# Altium PCB CT310高端控制盒基板电路V1.0.PcbDoc (part 1 of 8)
Units mil, origin at the board's own origin, x right, y up, seen from the top; angles counter-clockwise.
Board outline 8162.61 x 6196.81 mil, 2 copper layers (Top Layer, Bottom Layer), stack 65.792 mil thick; 265 components, 178 nets, 926 pads, 298 vias.
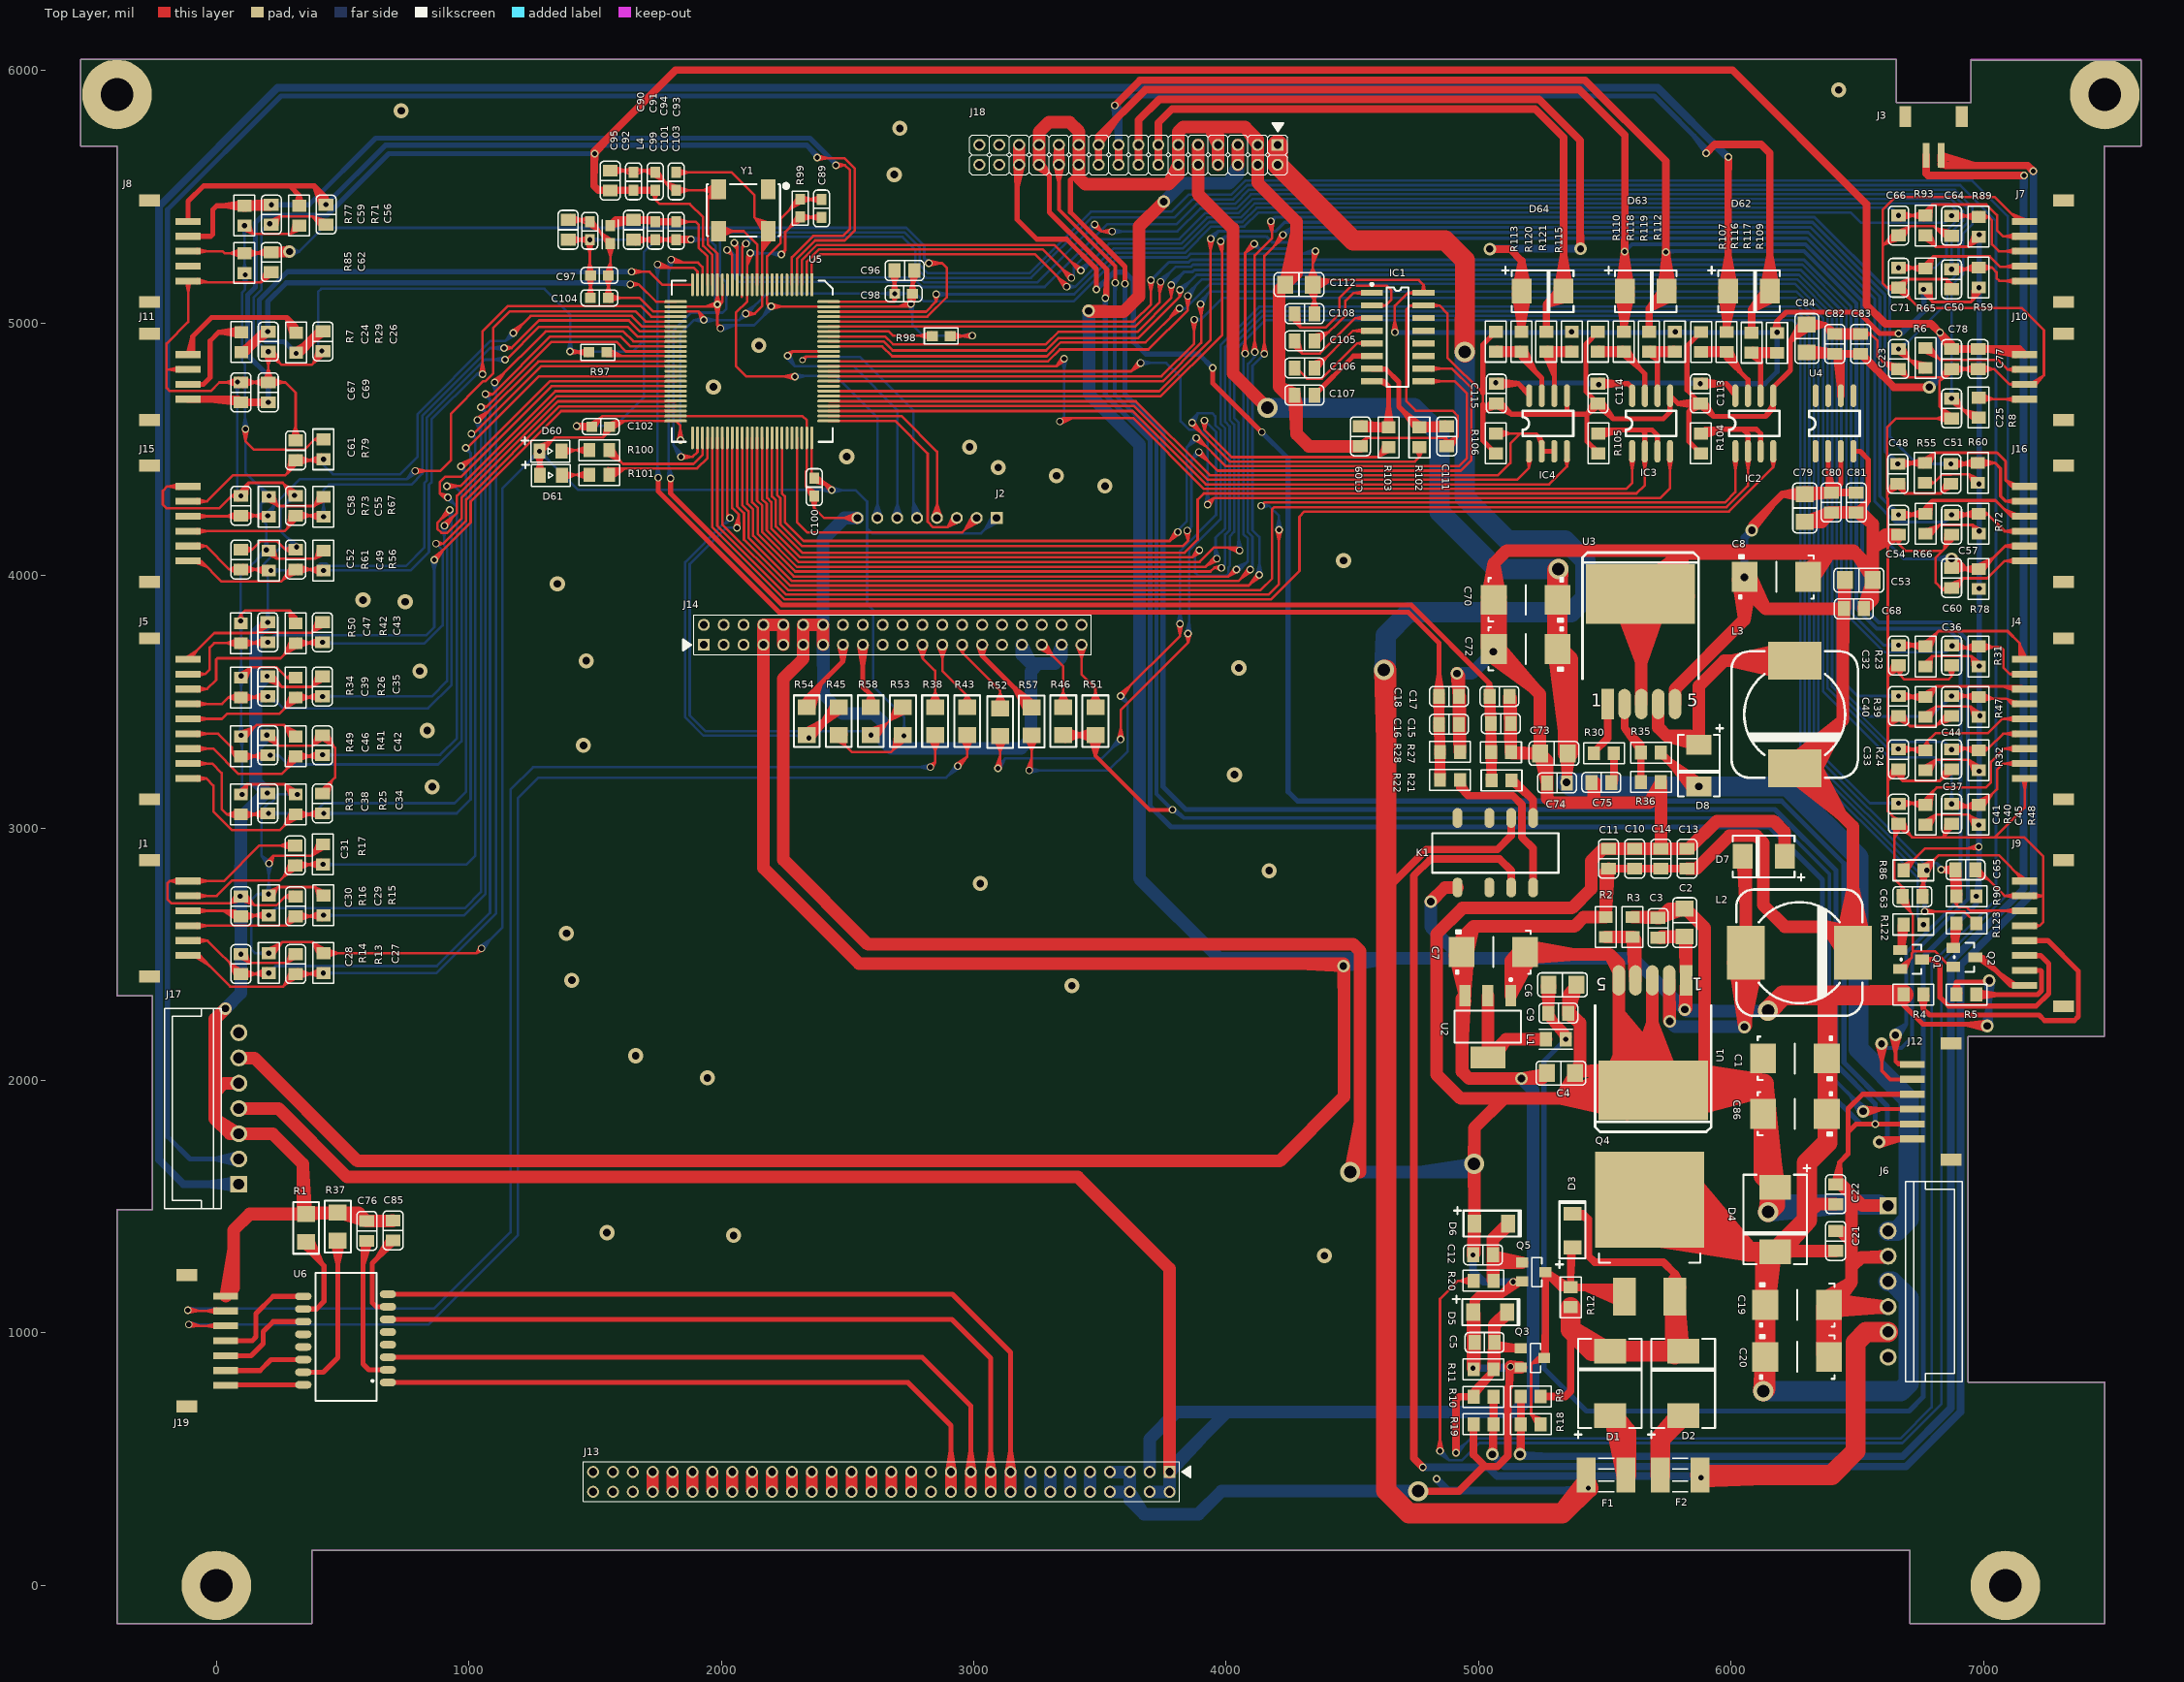
[diagram p0: Top Layer view]
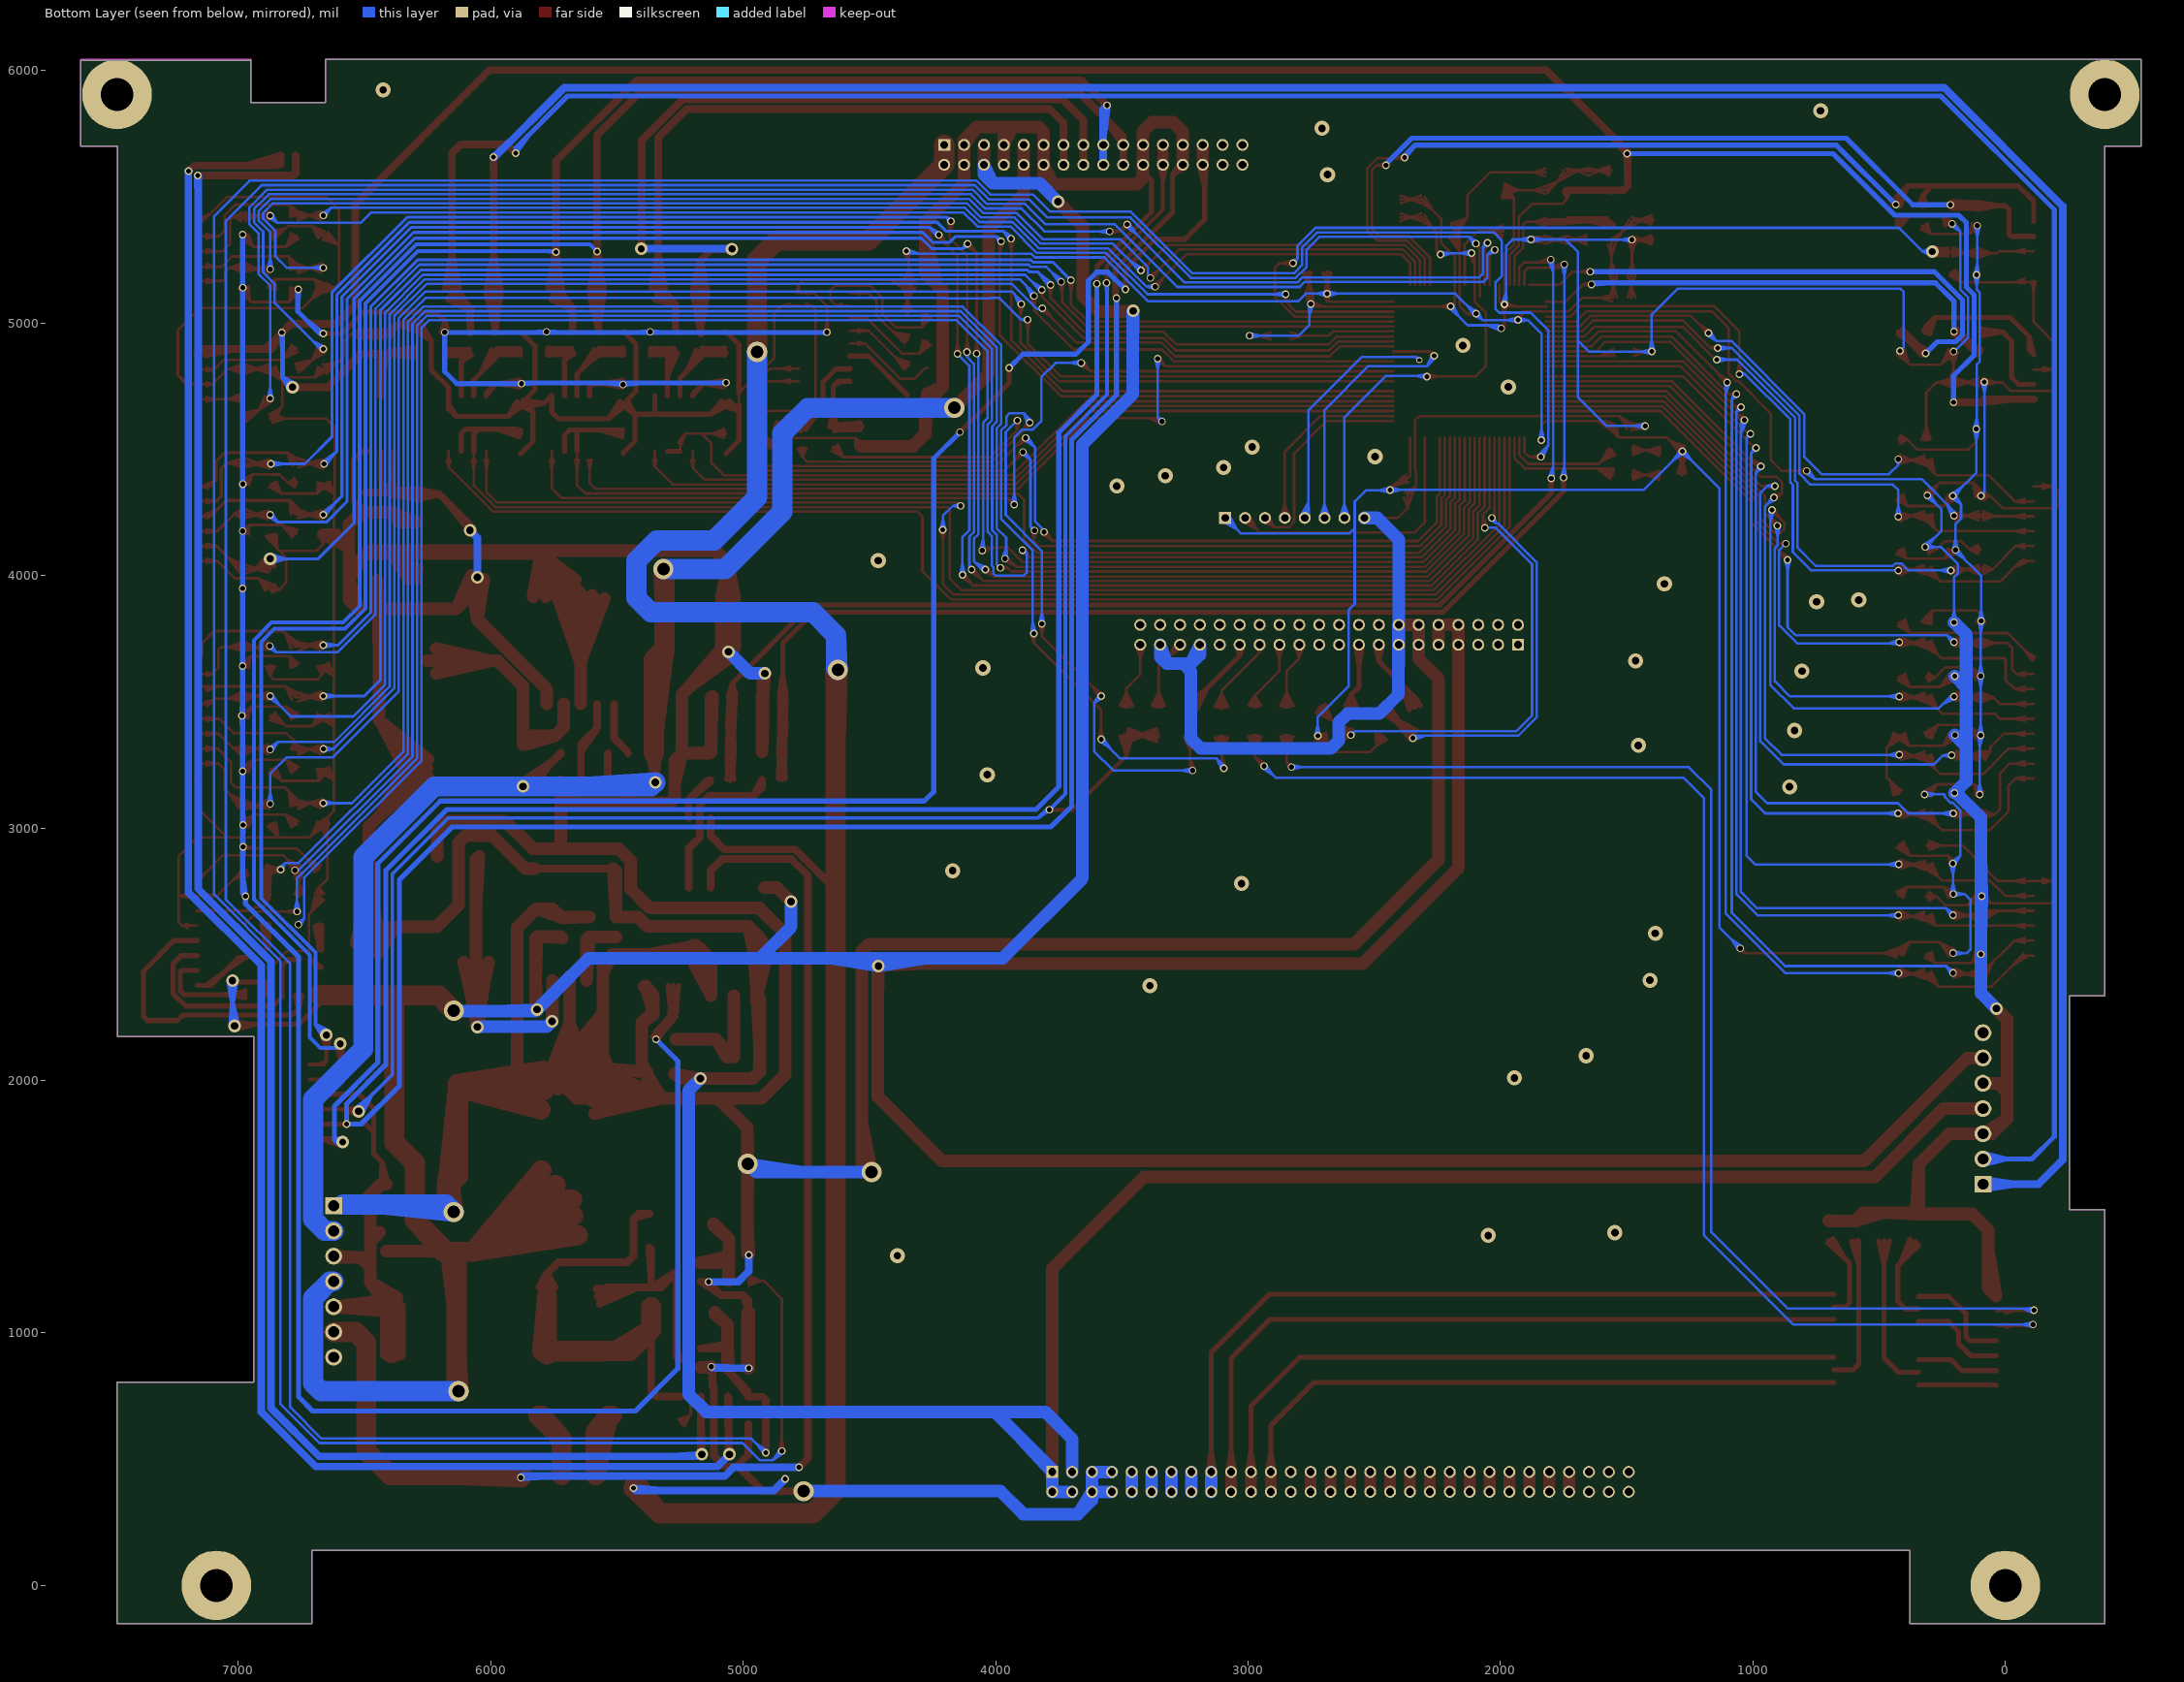
[diagram p1: Bottom Layer view, seen from below]
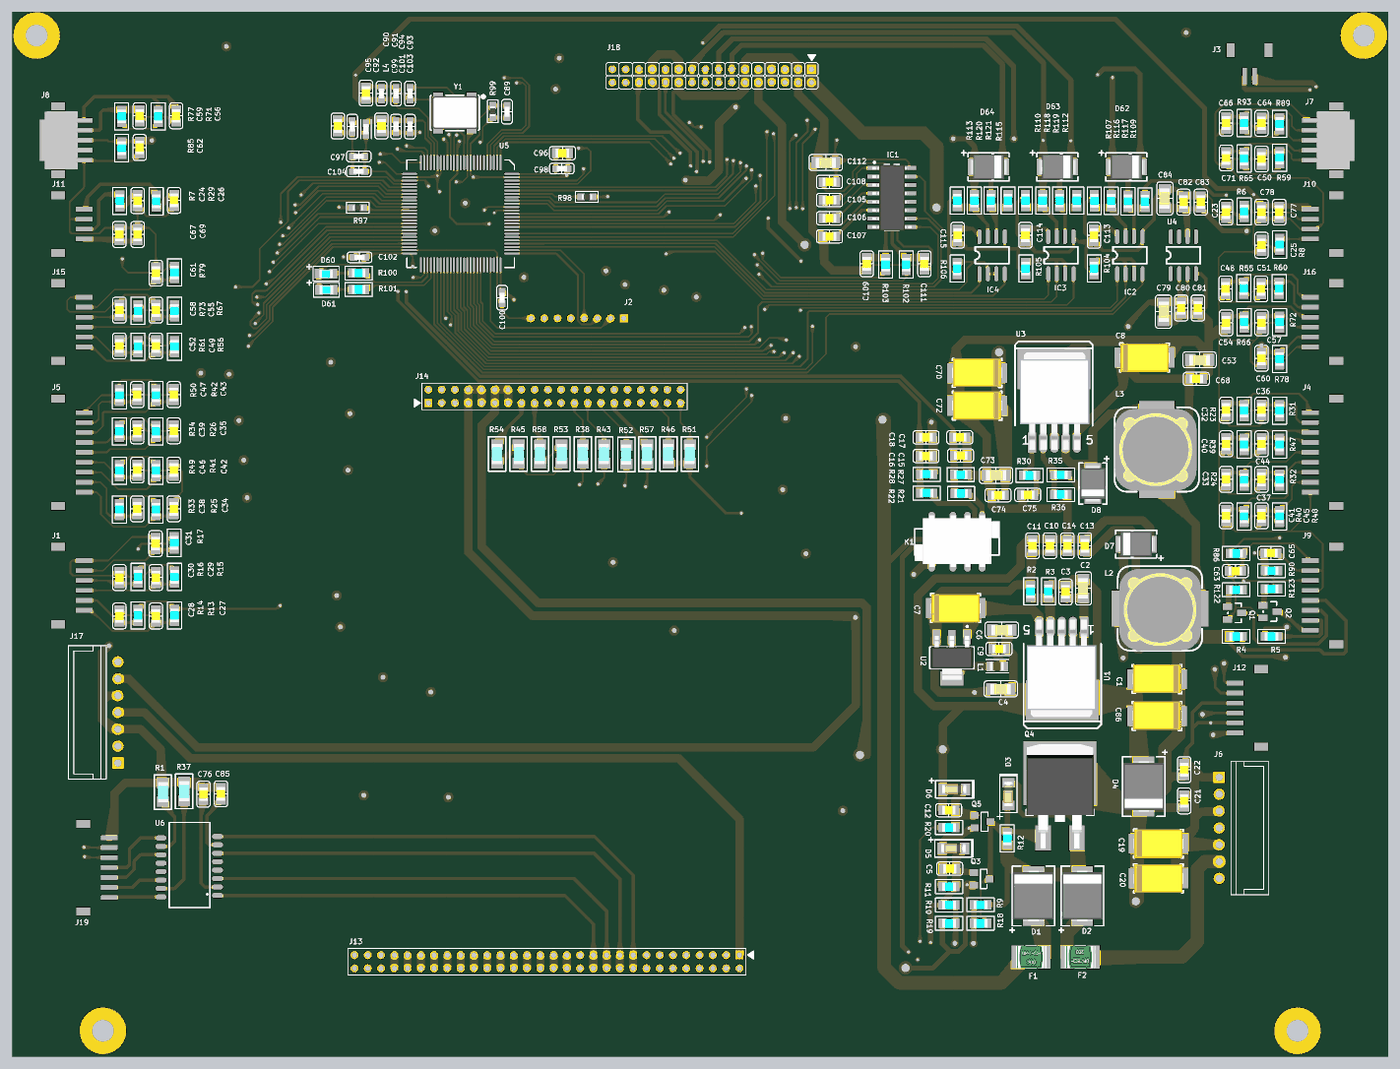
[diagram p9: 3D render of the assembled board from above, using the file's embedded part models]

## Layer stack, top to bottom
Top Layer: signal copper 1.4
Dielectric: core 62.9921, FR-4, Dk 4.8
Bottom Layer: signal copper 1.4

## Board outline
-538,5701 -393.7,5701 -393.7,2335 -253,2335 -253,1488 -392,1488 -393.7,1488 -393.7,-152 379,-152 379,139.3 6707.61,139.3 6707.61,137 6707.61,-152 7480.31,-152 7480.31,-147 7480.31,805 6939,805 6939,811 6939,2174 7479,2174 7479,5701 7624.61,5701 7624.61,6041 6951,6041 6951,6044.81 6951,5874 6655,5874 6655,6044.81 -538,6044.81 -538,5701

## Design rules (kind name [scope] priority, off if disabled: settings)
Clearance [All] p1: gap=8
PolygonConnect [All] p1: connectstyle=Relief reliefconductorwidth=10 reliefentries=4 polygonreliefangle="90 Angle" airgapwidth=10
RoutingVias [All] p1: holewidth=28 width=50 viastyle="Through Hole" minholewidth=16 minwidth=23 maxholewidth=50 maxwidth=100
SilkToSilkClearance [All] p1: silktosilkclearance=0
SilkToSolderMaskClearance SilkscreenOverComponentPads [IsPad] p1: minsilkscreentomaskgap=0 clearancetoexposedcopper=TRUE
SolderMaskExpansion [All] p1: expansion=4
Width [All] p1: maxlimit=100 minlimit=8 preferedwidth=10 minimp=50.000000 maximp=50.000000 favimp=50.000000
26 further rules are at their usual default settings.

## Classes and differential pairs
component class DataVideoPort: J18
component class TTL_TO_RS485: C113 C114 C115 D62 D63 D64 IC2 IC3 IC4 R104 R105 R106 R107 R109 R110 R112 R113 R115 R116 R117 R118 R119 R120 R121
component class TTL_TO_RS232: C105 C106 C107 C108 C109 C111 C112 IC1 R102 R103
component class RightInterface: J6 J12
component class Processor: C89 C90 C91 C92 C93 C94 C95 C96 C97 C98 C99 C100 C101 C102 C103 C104 D60 D61 J2 L4 R97 R98 R99 R100 R101 U5 Y1
component class PowerConvert: C1 C2 C3 C4 C6 C7 C8 C9 C10 C11 C13 C14 C53 C68 C70 C72 C73 C74 C79 C80 C81 C82 C83 C84 C86 D7 D8 L1 L2 L3 R2 R3 R30 R35 R36 U1 U2 U3 U4
component class OmapSystem: J13 J14 P14 R38 R43 R45 R46 R51 R52 R53 R54 R57 R58
component class LeftInterface: C76 C85 J17 J19 R1 R37 U6
component class KeyInput_MG: C50 C56 C59 C62 C63 C64 C65 C66 C71 J7 J8 J9 P6 Q1 Q2 R4 R5 R59 R65 R71 R77 R85 R86 R89 R90 R93 R122 R123
component class KeyInput_IJMEF: C48 C49 C51 C52 C54 C55 C57 C58 C60 C61 J15 J16 R55 R56 R60 R61 R66 R67 R72 R73 R78 R79
component class KeyInput_ABH: C27 C28 C29 C30 C31 C32 C33 C34 C35 C36 C37 C38 C39 C40 C41 C42 C43 C44 C45 C46 C47 J1 J4 J5 R13 R14 R15 R16 R17 R23 R24 R25 R26 R31 R32 R33 R34 R39 R40 R41 R42 R47 R48 R49 R50
component class JoyStickAdcInput: C23 C24 C25 C26 C67 C69 C77 C78 J10 J11 R6 R7 R8 R29
component class PowerManager: C5 C12 C15 C16 C17 C18 C19 C20 C21 C22 D1 D2 D3 D4 D5 D6 F1 F2 J3 K1 Q3 Q4 Q5 R9 R10 R11 R12 R18 R19 R20 R21 R22 R27 R28

## Components (designator, comment, footprint, x,y, rotation, side; value= is the part's Value field where it differs from the comment)
C1 "100uF/25V" CT7343-E-S 6253,2087 r180 top
C2 "2.2uF" C1206 5816.3,2625.3 r270 top
C3 "0.1uF" C0805 5710.3,2604.3 r270 top
C4 "22uF" C1206 5326,2029 r0 top
C5 "0.1uF" C0805 5023.3,962.3 r0 top
C6 "22uF" C1206 5332,2379 r0 top
C7 "100uF/25V" CT7343-E-S 5058,2509 r0 top
C8 "100uF/25V" CT7343-E-S 6179,3995 r0 top
C9 "0.1uF" C0805 5315.64,2266.3 r180 top
C10 "0.1uF" C0805 5617.96,2878.3 r270 top
C11 "0.1uF" C0805 5514.3,2878.3 r270 top
C12 "100pF" C0805 5017.3,1309.3 r0 top
C13 "100pF" C0805 5825.3,2878.3 r270 top
C14 "10uF" C0805 5721.63,2878.3 r270 top
C15 "10uF" C0805 5087.7,3413.3 r0 top
C16 "10uF" C0805 4882.7,3410.31 r0 top
C17 "0.1uF" C0805 5082.7,3521.3 r0 top
C18 "0.1uF" C0805 4882.7,3521.3 r0 top
C19 "100uF/25V" CT7343-E-S 6261.3,1111.3 r0 top
C20 "100uF/25V" CT7343-E-S 6261.3,905 r0 top
C21 "0.1uF" C0805 6414.3,1364.3 r270 top
C22 "10uF" C0805 6414.3,1549.3 r270 top
C23 "100pF" C0805 6663.3,4857.36 r270 top
C24 "100pF" C0805 205.65,4926.3 r270 top
C25 "100pF" C0805 6873.32,4661.36 r270 top
C26 "100pF" C0805 422.3,4927.3 r270 top
C27 "100pF" C0805 313.97,2461.05 r90 top
C28 "100pF" C0805 97.33,2461.05 r90 top
C29 "100pF" C0805 313.97,2689.55 r90 top
C30 "100pF" C0805 97.33,2689.55 r90 top
C31 "100pF" C0805 311.97,2891.3 r90 top
C32 "100pF" C0805 6663.3,3683.23 r270 top
C33 "100pF" C0805 6663.3,3272.23 r270 top
C34 "100pF" C0805 420.3,3097.23 r90 top
C35 "100pF" C0805 420.3,3560.3 r90 top
C36 "100pF" C0805 6873.32,3683.23 r270 top
C37 "100pF" C0805 6873.32,3272.23 r270 top
C38 "100pF" C0805 203.65,3097.23 r90 top
C39 "100pF" C0805 203.65,3560.3 r90 top
C40 "100pF" C0805 6663.3,3483.23 r270 top
C41 "100pF" C0805 6663.3,3056.23 r270 top
C42 "100pF" C0805 420.3,3327.23 r90 top
C43 "100pF" C0805 420.3,3775.3 r90 top
C44 "100pF" C0805 6873.32,3483.23 r270 top
C45 "100pF" C0805 6873.32,3056.23 r270 top
C46 "100pF" C0805 203.65,3327.23 r90 top
C47 "100pF" C0805 203.65,3775.3 r90 top
C48 "100pF" C0805 6660.3,4402.73 r270 top
C49 "100pF" C0805 313.97,4063.23 r90 top
C50 "100pF" C0805 6873.32,5173.3 r270 top
C51 "100pF" C0805 6870.32,4402.73 r270 top
C52 "100pF" C0805 97.33,4063.23 r90 top
C53 "22uF" C1206 6505.9,3981.42 r0 top
C54 "100pF" C0805 6663.3,4200.86 r270 top
C55 "100pF" C0805 313.97,4276.23 r90 top
C56 "100pF" C0805 434.3,5429.3 r270 top
C57 "100pF" C0805 6873.32,4200.86 r270 top
C58 "100pF" C0805 97.33,4276.23 r90 top
C59 "100pF" C0805 217.65,5429.3 r270 top
C60 "100pF" C0805 6873.32,3990.23 r270 top
C61 "100pF" C0805 313.97,4495.73 r90 top
C62 "100pF" C0805 217.65,5241.3 r270 top
C63 "100pF" C0805 6718.36,2728.3 r180 top
C64 "100pF" C0805 6873.32,5385.3 r270 top
C65 "100pF" C0805 6928.36,2834.3 r0 top
C66 "100pF" C0805 6663.3,5386.3 r270 top
C67 "100pF" C0805 97.33,4725.3 r90 top
C68 "0.1uF" C0805 6486.3,3868.3 r180 top
C69 "1uF" C0805 205.65,4725.3 r90 top
C70 "100uF/25V" CT7343-E-S 5186,3903.3 r180 top
C71 "100pF" C0805 6663.3,5179.3 r270 top
C72 "100uF/25V" CT7343-E-S 5186,3709 r180 top
C73 "22uF" C1206 5298.3,3295.3 r180 top
C74 "0.1uF" C0805 5310.3,3178.3 r0 top
C75 "0.1uF" C0805 5486,3180.33 r0 top
C76 "0.01uF" C0805 596,1404 r90 top
C77 "100pF" C0805 6978.33,4857.36 r270 top
C78 "1uF" C0805 6873.32,4857.36 r270 top
C79 "22uF" C1206 6291.7,4267.3 r90 top
C80 "0.1uF" C0805 6396.7,4288.95 r90 top
C81 "100pF" C0805 6495.7,4288.95 r90 top
C82 "100pF" C0805 6410.7,4917.08 r270 top
C83 "0.1uF" C0805 6512.7,4917.08 r270 top
C84 "22uF" C1206 6300,4938.73 r270 top
C85 "0.01uF" C0805 700,1406 r90 top
C86 "100uF/25V" CT7343-E-S 6253,1868 r180 top
C89 "0.1uF" C0603 2397,5454 r90 top
C90 "10uF" C0805 1560,5564 r90 top
C91 "0.1uF" C0603 1652.36,5561.29 r90 top
C92 "0.1uF" C0603 1479.29,5365.36 r90 top
C93 "0.1uF" C0603 1821.3,5561.3 r90 top
C94 "100pF" C0603 1738.3,5561.29 r90 top
C95 "10uF" C0805 1393.29,5369.29 r90 top
C96 "10uF" C0805 2726,5208 r0 top
C97 "0.1uF" C0603 1517.3,5188.3 r180 top
C98 "0.1uF" C0603 2722.2,5116.3 r0 top
C99 "10uF" C0805 1652.36,5369.29 r90 top
C100 "0.1uF" C0603 2368,4350 r270 top
C101 "0.1uF" C0603 1738.29,5365.36 r90 top
C102 "0.1uF" C0603 1522.2,4589.3 r180 top
C103 "100pF" C0603 1821.29,5365.36 r90 top
C104 "0.1uF" C0603 1517.2,5099.3 r180 top
C105 "0.1uF" C0805 4309.95,4929.36 r0 top
C106 "0.1uF" C0805 4309.95,4821.83 r0 top
C107 "15pF" C0805 4309.95,4714.3 r180 top
C108 "0.1uF" C0805 4309.95,5036.89 r180 top
C109 "15pF" C0805 4531.3,4551.23 r270 top
C111 "15pF" C0805 4873.3,4551.23 r270 top
C112 "10uF" C1206 4288.3,5152.3 r0 top
C113 "0.1uF" C0805 5878.41,4720.58 r90 top
C114 "0.1uF" C0805 5472.23,4720.58 r90 top
C115 "0.1uF" C0805 5069.98,4720.58 r90 top
D1 "MBRS410LT3" SMC 5520.3,800.3 r90 top
D2 "MBRS410LT3" SMC 5810.3,800.3 r90 top
D3 "ZMM16" SOD-80 5371.3,1405.3 r90 top
D4 "1.5SMC15A" SMC 6174.3,1449.3 r270 top
D5 "ZMM1" SOD-80 5045.3,1082.3 r0 top
D6 "ZMM1" SOD-80 5050.3,1433.3 r0 top
D7 "SK58" SMB 6129.3,2887.3 r180 top
D8 "SK58" SMB 5872.3,3247.3 r270 top
D60 "LED-G" LED0805 1323.3,4492.3 r0 top
D61 "LED-G" LED0805 1325.26,4396.69 r0 top
D62 "1.5SMC6.8CA" SMB 6070.68,5126.02 r0 top
D63 "1.5SMC6.8CA" SMB 5662.18,5126.02 r0 top
D64 "1.5SMC6.8CA" SMB 5253.68,5126.02 r0 top
F1 "2A" F1812 5505.3,437.3 r0 top
F2 "2A" F1812 5798.3,437.3 r180 top
IC1 "SP3232EEN" SO16-150 4679.3,4944.3 r270 top
IC2 "SP3078EEN-L/TR" SO-8 6017.02,4492.02 r90 top
IC3 "SP3078EEN-L/TR" SO-8 5608.52,4492.02 r90 top
IC4 "SP3078EEN-L/TR" SO-8 5200.02,4492.02 r90 top
J1 "ZH1X6WT-1.5" ZH1X6WT-1.5 -188.7,2642.35 r90 top
J2 "HD1X8-2.00" SHD1X8-2.00 2815,4228 r180 top
J3 "DS1X2-2.54" ZH1X2WT-1.5 6802,5741 r0 top
J4 "ZH1X9WT-1.5" ZH1X9WT-1.5 7239.3,3432.3 r270 top
J5 "ZH1X9WT-1.5" ZH1X9WT-1.5 -188.7,3432.3 r90 top
J6 "DS1X7-2.54" DS1X7H-2.54 6622,1204 r90 top
J7 "ZH1X5WT-1.5" ZH1X5WT-1.5 7239.3,5284.3 r270 top
J8 "HEADER1X5" ZH1X5WT-1.5 -188.7,5284.3 r90 top
J9 "Header 8" ZH1X8WT-1.5 7239.3,2583.3 r270 top
J10 "ZH1X4WT-1.5" ZH1X4WT-1.5 7239.3,4786.69 r270 top
J11 "ZH1X4WT-1.5" ZH1X4WT-1.5 -188.7,4786.69 r90 top
J12 "DS1X6-2.54" ZH1X6WT-1.5 6794,1916 r270 top
J13 "HEADER 30X2" HD2X30-2.00 2633.93,410.06 r180 top
J14 "HEADER 2X20" HD2X20-2.00 2678.88,3765.06 r0 top
J15 "HEADER1X6" ZH1X6WT-1.5 -188.7,4205.3 r90 top
J16 "HEADER1X6" ZH1X6WT-1.5 7239.3,4205.3 r270 top
J17 "DS1X7-2.54" DS1X7H-2.54 89,1889 r270 top
J18 "HEADER2X16" HD2X16-2.00 3612.81,5666.3 r180 top
J19 "ZH1X7WT-1.5" ZH1X7WT-1.5 -40,969 r90 top
K1 "G6K-2F-Y" G6K-2F-Y 5066,2902 r0 top
L1 "10uH" L0805-C 5305.8,2163.3 r180 top
L2 "22uH" L5050-P 6270.3,2506.3 r180 top
L3 "100uH" L5050-P 6252.07,3449.3 r90 top
L4 "10uH" L0603-C 1560.3,5350.61 r90 top
Q1 "8050" SOT-23#1 6713.45,2479.3 r270 top
Q2 "8050" SOT-23#1 6923.45,2487.3 r270 top
Q3 "S8050" SOT-23#2 5213.3,901.3 r90 top
Q4 "IRF5210S" TO-262 5677.3,1528.3 r0 top
Q5 "S8050" SOT-23#2 5218.3,1241.3 r90 top
R1 "75R" R1206 355.17,1415.9 r90 top
R2 "10K" R0805 5503.3,2607.58 r270 top
R3 "3.3K" R0805 5609.6,2607.58 r270 top
R4 "1K" R0805 6722.3,2340.3 r0 top
R5 "1K" R0805 6932.29,2340.3 r0 top
R6 "10R" R0805 6770.28,4861.29 r90 top
R7 "10R" R0805 99.29,4924.3 r90 top
R8 "10R" R0805 6980.3,4665.3 r90 top
R9 "0R" R0805 5206.3,748.3 r0 top
R10 "10K" R0805 5019.3,746.95 r180 top
R11 "2K" R0805 5019.3,855.61 r0 top
R12 "10K" R0805 5364.41,1141.36 r90 top
R13 "4.7K" R0805 424.26,2464.98 r90 top
R14 "4.7K" R0805 207.62,2464.98 r90 top
R15 "4.7K" R0805 424.26,2693.48 r90 top
R16 "4.7K" R0805 207.62,2693.48 r90 top
R17 "4.7K" R0805 422.26,2895.23 r90 top
R18 "0R(N.C)" R0805 5206.3,638.3 r0 top
R19 "0R(N.C)" R0805 5019.3,638.3 r0 top
R20 "1K" R0805 5019.3,1206.3 r0 top
R21 "20K" R0805 5090.7,3188.3 r180 top
R22 "20K" R0805 4886.64,3190.3 r180 top
R23 "4.7K" R0805 6770.28,3679.3 r270 top
R24 "4.7K" R0805 6770.28,3268.3 r270 top
R25 "4.7K" R0805 313.94,3093.3 r90 top
R26 "4.7K" R0805 313.94,3556.36 r90 top
R27 "1K" R0805 5088.7,3300.3 r180 top
R28 "1K" R0805 4886.64,3301.28 r180 top
R29 "10R" R0805 315.94,4922.3 r90 top
R30 "2K" R0805 5496.17,3295.9 r0 top
R31 "4.7K" R0805 6980.3,3679.3 r270 top
R32 "4.7K" R0805 6980.3,3268.3 r270 top
R33 "4.7K" R0805 97.29,3093.3 r90 top
R34 "4.7K" R0805 97.29,3556.36 r90 top
R35 "10K" R0805 5682.3,3298.3 r180 top
R36 "2K" R0805 5682.3,3182.3 r0 top
R37 "75R" R1206 481,1421 r90 top
R38 "330R" R1206 2846.61,3423 r270 top
R39 "4.7K" R0805 6770.28,3479.3 r270 top
R40 "4.7K" R0805 6770.28,3052.3 r270 top
R41 "4.7K" R0805 313.94,3323.3 r90 top
R42 "4.7K" R0805 313.94,3771.36 r90 top
R43 "330R" R1206 2973.69,3423 r270 top
R45 "330R" R1206 2465.37,3423 r90 top
R46 "0R" R1206 3354.92,3423 r270 top
R47 "4.7K" R0805 6980.3,3479.29 r270 top
R48 "4.7K" R0805 6980.3,3052.29 r270 top
R49 "4.7K" R0805 97.29,3323.3 r90 top
R50 "4.7K" R0805 97.29,3771.36 r90 top
R51 "0R(NC)" R1206 3482,3423 r270 top
R52 "330R" R1206 3105,3419 r270 top
R53 "330R" R1206 2719.53,3423 r90 top
R54 "330R" R1206 2338.3,3423 r270 top
R55 "4.7K" R0805 6767.28,4406.67 r270 top
R56 "4.7K" R0805 424.26,4059.3 r90 top
R57 "330R" R1206 3229,3422 r270 top
R58 "330R" R1206 2592.45,3423 r270 top
R59 "4.7K" R0805 6980.3,5180.3 r270 top
R60 "4.7K" R0805 6977.3,4406.67 r270 top
R61 "4.7K" R0805 207.62,4059.3 r90 top
R65 "4.7K" R0805 6770.28,5176.3 r270 top
R66 "4.7K" R0805 6770.27,4204.8 r270 top
R67 "4.7K" R0805 424.26,4272.29 r90 top
R71 "4.7K" R0805 327.94,5425.36 r270 top
R72 "4.7K" R0805 6980.3,4204.8 r270 top
R73 "4.7K" R0805 207.62,4272.29 r90 top
R77 "4.7K" R0805 111.29,5425.36 r270 top
R78 "4.7K" R0805 6980.3,3986.3 r270 top
R79 "4.7K" R0805 424.26,4499.67 r90 top
R85 "4.7K" R0805 111.29,5237.36 r270 top
R86 "4.7K" R0805 6722.3,2832.3 r180 top
R89 "4.7K" R0805 6980.3,5381.3 r270 top
R90 "4.7K" R0805 6932.29,2729.77 r0 top
R93 "4.7K" R0805 6770.27,5386.3 r270 top
R97 "10K" R0603 1511.3,4884.3 r180 top
R98 "10K" R0603 2871,4948.3 r180 top
R99 "10K" R0603 2312.3,5455.3 r270 top
R100 "470R" R0805 1517.2,4496.3 r180 top
R101 "470R" R0805 1517.2,4398.69 r180 top
R102 "10R" R0805 4765.3,4547.3 r270 top
R103 "10R" R0805 4643.3,4547.3 r270 top
R104 "10K" R0805 5880.38,4523.02 r270 top
R105 "10K" R0805 5474.2,4523.02 r270 top
R106 "10K" R0805 5068.01,4523.02 r270 top
R107 "10K" R0805 5881.02,4925.02 r90 top
R109 "10K" R0805 6182.02,4921.02 r270 top
R110 "10K" R0805 5472.02,4926.01 r90 top
R112 "10K" R0805 5777.02,4926.02 r270 top
R113 "10K" R0805 5068.02,4926.01 r90 top
R115 "10K" R0805 5369.02,4926.01 r270 top
R116 "10R" R0805 5982.02,4925.02 r270 top
R117 "10R" R0805 6081.02,4922.02 r270 top
R118 "10R" R0805 5575.02,4926.02 r270 top
R119 "10R" R0805 5675.02,4926.02 r270 top
R120 "10R" R0805 5169.56,4926.02 r270 top
R121 "10R" R0805 5268.02,4926.02 r270 top
R122 "1K" R0805 6722.3,2617.3 r0 top
R123 "1K" R0805 6932.3,2622.3 r0 top
U1 "LM2596_ADJ" TO263 5821.3,2396.3 r180 top
U2 "AMS1117-3.3" SOT-223 5036.3,2213.3 r180 top
U3 "LM2577_ADJ" TO263 5511.17,3490.9 r0 top
U4 "REF192" SO-8 6334.7,4492.02 r90 top
U5 "STM32F103VCT6" STM32F103VCT6 2122.29,4848.3 r270 top
U6 "H1102NL" SOP16 512,974 r180 top
Y1 "XTAL 8MHz" "XTAL 5.0X7.0-SM" 2087.3,5446.3 r180 top

## Footprints (in the part's own frame and the unit in brackets; to place one, negate y for a bottom-side part, rotate by r counter-clockwise, add the part's x,y. Pads: shape width x height; smd on the part's side, far side on the other; paste and mask are expansions set on the pad)
C0603 [mm]
  rect 1.1x1 smd: 1(-0.9,0) 2(0.9,0)
  silkscreen extent -1.85,-0.8 1.85,0.8, body extent -0.76,-0.39 0.76,0.38, height 0.46
C0805 [mm]
  rect 1.2x1.5 smd: 1(-1,0) 2(1,0)
  silkscreen extent -1.95,-1 1.95,1, body extent -1.02,-0.64 1.02,0.64, height 0.61
C1206 [mm]
  rect 1.6x1.8 smd: 1(-1.4,0) 2(1.4,0)
  silkscreen extent -2.5,-1.2 2.5,1.2, body extent -1.52,-0.82 1.52,0.71, height 0.61
CT7343-E-S [mm]
  rect 2.6x3 smd: 1(-3.2,0) 2(3.2,0)
  silkscreen extent -3.75,-2.2 3.75,2.2, body extent -3.75,-2.2 3.75,2.12, height 4
DS1X7H-2.54 [mm]
  rect 1.7x1.7 hole 1.1: 1(7.62,0)
  round 1.7 hole 1.1: 2(5.08,0) 3(2.54,0) 4(0,0) 5(-2.54,0) 6(-5.08,0) 7(-7.62,0)
  silkscreen extent -10.08,-7.47 10.06,-1.77
F1812 [mm]
  rect 1.9x3.5 smd: 1(-2,0) 2(2,0)
  silkscreen extent -0.8,-1.7 0.8,1.7, body extent -2.29,-1.65 2.31,1.65, height 0.69
G6K-2F-Y [mm]
  oval 1x2 smd: 1(-3.8,-3.5) 2(-0.6,-3.5) 3(1.6,-3.5) 4(3.8,-3.5) 5(3.8,3.5) 6(1.6,3.5) 7(-0.6,3.5) 8(-3.8,3.5)
  silkscreen extent -6.37,-2.01 6.36,1.95, body extent -6.36,-3.83 6.44,3.97, height 5.4
HD2X16-2.00 [mm]
  rect 1.2x1.2 hole 0.8: 1(-15,-1)
  round 1.2 hole 0.8: 2(-15,1) 3(-13,-1) 4(-13,1) 5(-11,-1) 6(-11,1) 7(-9,-1) 8(-9,1) 9(-7,-1) 10(-7,1) 11(-5,-1) 12(-5,1) 13(-3,-1) 14(-3,1) 15(-1,-1) 16(-1,1) 17(1,-1) 18(1,1) 19(3,-1) 20(3,1) 21(5,-1) 22(5,1) 23(7,-1) 24(7,1) 25(9,-1) 26(9,1) 27(11,-1) 28(11,1) 29(13,-1) 30(13,1) 31(15,-1) 32(15,1)
  silkscreen extent -16,-3.19 16,1.99
HD2X20-2.00 [mm]
  rect 1.2x1.2 hole 0.8: 1(-19,-1)
  round 1.2 hole 0.8: 2(-19,1) 3(-17,-1) 4(-17,1) 5(-15,-1) 6(-15,1) 7(-13,-1) 8(-13,1) 9(-11,-1) 10(-11,1) 11(-9,-1) 12(-9,1) 13(-7,-1) 14(-7,1) 15(-5,-1) 16(-5,1) 17(-3,-1) 18(-3,1) 19(-1,-1) 20(-1,1) 21(1,-1) 22(1,1) 23(3,-1) 24(3,1) 25(5,-1) 26(5,1) 27(7,-1) 28(7,1) 29(9,-1) 30(9,1) 31(11,-1) 32(11,1) 33(13,-1) 34(13,1) 35(15,-1) 36(15,1) 37(17,-1) 38(17,1) 39(19,-1) 40(19,1)
  silkscreen extent -21.09,-2.01 20,1.99
HD2X30-2.00 [mm]
  rect 1.2x1.2 hole 0.8: 1(-29,-1)
  round 1.2 hole 0.8: 2(-29,1) 3(-27,-1) 4(-27,1) 5(-25,-1) 6(-25,1) 7(-23,-1) 8(-23,1) 9(-21,-1) 10(-21,1) 11(-19,-1) 12(-19,1) 13(-17,-1) 14(-17,1) 15(-15,-1) 16(-15,1) 17(-13,-1) 18(-13,1) 19(-11,-1) 20(-11,1) 21(-9,-1) 22(-9,1) 23(-7,-1) 24(-7,1) 25(-5,-1) 26(-5,1) 27(-3,-1) 28(-3,1) 29(-1,-1) 30(-1,1) 31(1,-1) 32(1,1) 33(3,-1) 34(3,1) 35(5,-1) 36(5,1) 37(7,-1) 38(7,1) 39(9,-1) 40(9,1) 41(11,-1) 42(11,1) 43(13,-1) 44(13,1) 45(15,-1) 46(15,1) 47(17,-1) 48(17,1) 49(19,-1) 50(19,1) 51(21,-1) 52(21,1) 53(23,-1) 54(23,1) 55(25,-1) 56(25,1) 57(27,-1) 58(27,1) 59(29,-1) 60(29,1)
  silkscreen extent -31.09,-2.01 30,1.99
L0603-C [mm]
  rect 1.1x1 smd: 1(-0.9,0) 2(0.9,0)
  silkscreen extent -1.45,-0.8 1.45,0.8, body extent -0.76,-0.39 0.76,0.38, height 0.46
L0805-C [mm]
  rect 1.2x1.5 smd: 1(-1,0) 2(1,0)
  silkscreen extent -1.7,-1 1.7,1, body extent -0.95,-0.65 1.08,0.63, height 0.61
L5050-P [mm]
  rect 3.8x5.4 smd: 1(-5.4,0) 2(5.4,0)
  silkscreen extent -6.35,-6.35 6.35,6.35, body extent -6.18,-5.97 6.12,6.33, height 6
LED0805 [mm]
  rect 1.2x1.5 smd: 1(-1.1,0) 2(1.1,0)
  silkscreen extent -2.9,-1.1 1.95,1.4, body extent -1.02,-0.64 1.02,0.64, height 0.56
R0603 [mm]
  rect 1.1x1 smd: 1(-0.9,0) 2(0.9,0)
  silkscreen extent -1.7,-0.8 1.7,0.8, body extent -0.79,-0.39 0.74,0.38, height 0.46
R0805 [mm]
  rect 1.2x1.4 smd: 1(-1,0) 2(1,0)
  silkscreen extent -2.05,-1.05 2.05,1.05, body extent -1.02,-0.65 1.02,0.62, height 0.61
R1206 [mm]
  rect 1.6x1.8 smd: 1(-1.4,0) 2(1.4,0)
  silkscreen extent -2.6,-1.3 2.6,1.3, body extent -1.52,-0.8 1.52,0.72, height 0.61
SHD1X8-2.00 [mm]
  rect 1.2x1.2 hole 0.762: 1(-7,0)
  round 1.2 hole 0.762: 2(-5,0) 3(-3,0) 4(-1,0) 5(1,0) 6(3,0) 7(5,0) 8(7,0)
SMB [mm]
  rect 2x2.5 smd: 1(-2.1,0) 2(2.1,0)
  silkscreen extent -4.1,-2.1 3.1,2.45, body extent -2.79,-1.91 2.81,1.89, height 2.4
SMC [mm]
  rect 2.5x3.2 smd: 1(-3.25,0) 2(3.25,0)
  silkscreen extent -5.5,-3.2 4.5,3.55, body extent -3.8,-3.1 3.8,3.12, height 2.8
SO16-150 [mm]
  rect 0.6x2.2 smd: 1(-4.445,-2.6) 2(-3.175,-2.6) 3(-1.905,-2.6) 4(-0.635,-2.6) 5(0.635,-2.6) 6(1.905,-2.6) 7(3.175,-2.6) 8(4.445,-2.6) 9(4.445,2.6) 10(3.175,2.6) 11(1.905,2.6) 12(0.635,2.6) 13(-0.635,2.6) 14(-1.905,2.6) 15(-3.175,2.6) 16(-4.445,2.6)
  silkscreen extent -5.42,-2.72 5,1.1, body extent -4.95,-2.92 5.02,3.02, height 1.35
SO-8 [mil]
  oval 90x24 smd: 1(0.04,0.29) 2(0.04,-49.71) 3(0.04,-99.71) 4(0.04,-149.71) 5(220.04,-149.71) 6(220.04,-99.71) 7(220.04,-49.71) 8(220.04,0.29)
  silkscreen extent 60,-175 160,25
SOD-80 [mm]
  rect 1.4x1.8 smd: 1(-1.7,0) 2(1.7,0)
  silkscreen extent -3.75,-1.3 3.03,1.65, body extent -1.85,-0.79 1.85,0.81, height 1.6
SOP16 [mm]
  oval 1.65x0.76 smd: 1(-4.257,4.331) 2(-4.257,3.061) 3(-4.257,1.791) 4(-4.257,0.521) 5(-4.257,-0.749) 6(-4.257,-2.019) 7(-4.257,-3.289) 8(-4.257,-4.559) 9(4.257,-4.331) 10(4.257,-3.061) 11(4.257,-1.791) 12(4.257,-0.521) 13(4.257,0.749) 14(4.257,2.019) 15(4.257,3.289) 16(4.257,4.559)
  silkscreen extent -3.13,-6.68 3.02,6.17
SOT-23#1 [mm]
  rect 1x1.4 smd: 1(-0.95,-1.1) 2(0.95,-1.1) 3(0,1.1)
  silkscreen extent -1.47,-1.02 1.45,1, body extent -1.41,-1 1.38,1.42, height 1.09
SOT-23#2 [mm] "SOT-23"
  rect 1x1.2 smd: 1(0.953,1.175) 2(-0.953,1.175) 3(-0.013,-1.175)
  silkscreen extent -1.46,-0.81 1.44,0.21
SOT-223 [mm]
  rect 1.1x2.15 smd: 1(-2.3,-3.1) 2(0,-3.1) 3(2.3,-3.1)
  rect 3.5x2.15 smd: 4(0,3.1)
  silkscreen extent -3.35,-4.85 3.35,1.63, body extent -3.15,-3.3 3.15,3.3, height 1.8
STM32F103VCT6 [mil]
  rect 90x11.5 smd: 1(-303.15,236.22)
  oval 90x11.5 smd: 2(-303.15,216.53) 3(-303.15,196.85) 4(-303.15,177.16) 5(-303.15,157.48) 6(-303.15,137.8) 7(-303.15,118.11) 8(-303.15,98.43) 9(-303.15,78.74) 10(-303.15,59.06) 11(-303.15,39.37) 12(-303.15,19.68) 13(-303.15,0) 14(-303.15,-19.69) 15(-303.15,-39.37) 16(-303.15,-59.06) 17(-303.15,-78.74) 18(-303.15,-98.43) 19(-303.15,-118.11) 20(-303.15,-137.8) 21(-303.15,-157.48) 22(-303.15,-177.17) 23(-303.15,-196.85) 24(-303.15,-216.53) 25(-303.15,-236.22) 51(303.15,-236.22) 52(303.15,-216.53) 53(303.15,-196.85) 54(303.15,-177.16) 55(303.15,-157.48) 56(303.15,-137.8) 57(303.15,-118.11) 58(303.15,-98.43) 59(303.15,-78.74) 60(303.15,-59.06) 61(303.15,-39.37) 62(303.15,-19.69) 63(303.15,0) 64(303.15,19.68) 65(303.15,39.37) 66(303.15,59.06) 67(303.15,78.74) 68(303.15,98.43) 69(303.15,118.11) 70(303.15,137.8) 71(303.15,157.48) 72(303.15,177.17) 73(303.15,196.85) 74(303.15,216.53) 75(303.15,236.22)
  oval 11.5x90 smd: 26(-236.22,-303.15) 27(-216.54,-303.15) 28(-196.85,-303.15) 29(-177.17,-303.15) 30(-157.48,-303.15) 31(-137.8,-303.15) 32(-118.11,-303.15) 33(-98.43,-303.15) 34(-78.74,-303.15) 35(-59.06,-303.15) 36(-39.37,-303.15) 37(-19.69,-303.15) 38(0,-303.15) 39(19.68,-303.15) 40(39.37,-303.15) 41(59.05,-303.15) 42(78.74,-303.15) 43(98.42,-303.15) 44(118.11,-303.15) 45(137.79,-303.15) 46(157.48,-303.15) 47(177.16,-303.15) 48(196.85,-303.15) 49(216.53,-303.15) 50(236.22,-303.15) 76(236.22,303.15) 77(216.53,303.15) 78(196.85,303.15) 79(177.16,303.15) 80(157.48,303.15) 81(137.79,303.15) 82(118.11,303.15) 83(98.42,303.15) 84(78.74,303.15) 85(59.05,303.15) 86(39.37,303.15) 87(19.68,303.15) 88(0,303.15) 89(-19.69,303.15) 90(-39.37,303.15) 91(-59.06,303.15) 92(-78.74,303.15) 93(-98.43,303.15) 94(-118.11,303.15) 95(-137.8,303.15) 96(-157.48,303.15) 97(-177.17,303.15) 98(-196.85,303.15) 99(-216.54,303.15) 100(-236.22,303.15)
  silkscreen extent -319,-319 319,319
TO263 [mil]
  rect 433.07x236.22 smd: 0(130,435)
  rect 50x120 smd: 1(0,0)
  oval 50x120 smd: 2(66.67,0) 3(133.33,0) 4(200,0) 5(266.67,0)
  silkscreen extent -100,100 360,600, body extent -71,-44 340,534, height 177
TO-262 [mm] "D2PAK"
  rect 2.32x3.81 smd: 1(-2.54,-9.77) 3(2.54,-9.77)
  rect 11x9.65 smd: 2(0,0)
  silkscreen extent -5.1,-6.35 5.1,-5.45, body extent -5.08,-11.35 5.08,4.41, height 4.5
"XTAL 5.0X7.0-SM" [mm]
  rect 1.5x2 smd: 1(-2.5,-2.1) 2(2.5,-2.1) 3(2.5,2.1) 4(-2.5,2.1)
  silkscreen extent -4.5,-2.65 3.7,2.65, body extent -3.55,-2.55 3.45,2.45, height 1.5
ZH1X2WT-1.5 [mm]
  rect 1.2x2.1 smd: 0(-2.85,1.95) 0(2.85,1.95)
  rect 0.7x2.5 smd: 1(-0.75,-1.95) 2(0.75,-1.95)
ZH1X4WT-1.5 [mm]
  rect 1.2x2.1 smd: 0(-4.35,1.95) 0(4.35,1.95)
  rect 0.7x2.5 smd: 1(-2.25,-1.95) 2(-0.75,-1.95) 3(0.75,-1.95) 4(2.25,-1.95)
ZH1X5WT-1.5 [mm]
  rect 1.2x2.1 smd: 0(-5.1,1.95) 0(5.1,1.95)
  rect 0.7x2.5 smd: 1(-3,-1.95) 2(-1.5,-1.95) 3(0,-1.95) 4(1.5,-1.95) 5(3,-1.95)
  body extent -4.4,-3 4.4,4.75, height 4.23
ZH1X6WT-1.5 [mm]
  rect 1.2x2.1 smd: 0(-5.85,1.95) 0(5.85,1.95)
  rect 0.7x2.5 smd: 1(-3.75,-1.95) 2(-2.25,-1.95) 3(-0.75,-1.95) 4(0.75,-1.95) 5(2.25,-1.95) 6(3.75,-1.95)
ZH1X7WT-1.5 [mm]
  rect 1.2x2.1 smd: 0(-6.6,1.95) 0(6.6,1.95)
  rect 0.7x2.5 smd: 1(-4.5,-1.95) 2(-3,-1.95) 3(-1.5,-1.95) 4(0,-1.95) 5(1.5,-1.95) 6(3,-1.95) 7(4.5,-1.95)
ZH1X8WT-1.5 [mm]
  rect 1.2x2.1 smd: 0(-7.35,1.95) 0(7.35,1.95)
  rect 0.7x2.5 smd: 1(-5.25,-1.95) 2(-3.75,-1.95) 3(-2.25,-1.95) 4(-0.75,-1.95) 5(0.75,-1.95) 6(2.25,-1.95) 7(3.75,-1.95) 8(5.25,-1.95)
ZH1X9WT-1.5 [mm]
  rect 1.2x2.1 smd: 0(-8.1,1.95) 0(8.1,1.95)
  rect 0.7x2.5 smd: 1(-6,-1.95) 2(-4.5,-1.95) 3(-3,-1.95) 4(-1.5,-1.95) 5(0,-1.95) 6(1.5,-1.95) 7(3,-1.95) 8(4.5,-1.95) 9(6,-1.95)

## Part data
C1 C7 C8 C19 C20 C70 C72 C86: library part ELECTRO, "Electrolytic Capacitor"
C2 C4 C6 C10 C11 C13 C14 C15 C16 C17 C18 C53 C68 C73 C74 C75 C79 C80 C81 C82 C83 C84 C89 C90 C91 C92 C94 C95 C96 C97 C98 C99 C100 C101 C102 C103 C104 C105 C106 C108 C112 C113 C114 C115: library part CAP, "CAP"
C3 C9: library part Cap, "CAP"
C5 C12 C21 C22 C23 C24 C25 C26 C27 C28 C29 C30 C31 C32 C33 C34 C35 C36 C37 C38 C39 C40 C41 C42 C43 C44 C45 C46 C47 C48 C49 C50 C51 C52 C54 C55 C56 C57 C58 C59 C60 C61 C62 C63 C64 C65 C66 C67 C69 C71 C76 C77 C78 C85 C93 C107 C109 C111: library part Cap, "Capacitor"
D1 D2 D3 D4 D5 D6: library part DIODE-ZENER, "Small Signal Zener Diodes"
D7: library part DIODE1, "Diode"
D8: library part DIODE-SCHOTTKY, "Schottky barrier rectifier"
D60 D61: library part LED
D62 D63 D64: library part P0080_1
F1 F2: library part FUSE2, "Fuse"
IC1: library part MAX232ACPE, "+5V Powered, Multi-Channel RS-232 Driver/Receiver"
IC2 IC3 IC4: library part SP3078EEN
J1 J12: library part HEADER1X6
J2: library part HEADER1X8
J3: library part "Header 2", "Header, 2-Pin"
J4 J5: library part "Header 9", "Header, 9-Pin"
J6 J17 J19: library part HEADER1X7
J7: library part HEADER1X5
J9: "Header, 8-Pin"
J10 J11: library part HEADER1X4
L1 L2 L3 L4: library part INDUCTOR, "INDUCTOR"
Q1 Q2 Q3 Q5: library part NPN, "NPN General Purpose Amplifier"
Q4: library part PMOS, "P-Channel 30-V (D-S), 150 C MOSFET"
R1 R9 R10 R11 R12 R20 R37 R38 R43 R45 R46 R51 R52 R53 R54 R57 R58 R97 R98 R99 R100 R101 R103: library part Res, "Resistor"
R2 R3 R4 R5 R6 R7 R8 R13 R14 R15 R16 R17 R18 R19 R21 R22 R23 R24 R25 R26 R27 R28 R29 R30 R31 R32 R33 R34 R35 R36 R39 R40 R41 R42 R47 R48 R49 R50 R55 R56 R59 R60 R61 R65 R66 R67 R71 R72 R73 R77 R78 R79 R85 R86 R89 R90 R93 R102 R104 R105 R106 R107 R109 R110 R112 R113 R115 R116 R117 R118 R119 R120 R121 R122 R123: library part RES, "Resistor"
U1: library part LM2575
U2: library part REG1117-3.3, "800mA and 1A Low Dropout Positive Regulator 2.85V, 3.3V, 5V, and Adjustable"
U3: library part LM2577
U4: library part REF192/5/7
Y1: library part XTAL

## Free pads (board coordinates)
  round 275.59 hole 129.92: 0(-393.7,5905.51) 0(0,0) 0(7086.61,0) 0(7480.32,5905.51)

## Via types
v1: diameter 30, hole 20, Top Layer to Bottom Layer, tented both sides, 226 vias
v2: diameter 60, hole 30, Top Layer to Bottom Layer, tented both sides, 32 vias
v3: diameter 50, hole 30, Top Layer to Bottom Layer, tented both sides, 20 vias
v4: diameter 80, hole 50, Top Layer to Bottom Layer, tented both sides, 10 vias
v5: diameter 50, hole 28, Top Layer to Bottom Layer, tented both sides, 8 vias
v6: diameter 24, hole 16, Top Layer to Bottom Layer, tented both sides, 1 vias
v7: diameter 30, hole 16, Top Layer to Bottom Layer, tented both sides, 1 vias

## Nets (pads, with @x,y where several pads share a name; then routed paths per layer and width w, separated by ;. In a path a pad name is that pad's centre, name@x,y a point inside that pad or via, vN(x,y) a via of type N, cw(c..) or ccw(c..) an arc to the next point about the centre after c; other vN are vias at no path point)
12V: C1.1 C2.2 C3.2 C19.1 C20.1 C21.2 C22.2 C86.1 D4.2 J6.4 J14.7 J14.8 J14.9 J14.10 J17.6 J18.5 J18.6 K1.1 Q4.2 R4.1 R5.1 U1.1 | length 29637.6
  Top Layer w20: 6682.93,2300.07 6760,2223 v3@7015,2223 ; R5.1@6879.46,2346.26 6892.92,2389.92 ; R5.1@6892.92,2340.29 6892.92,2389.92 ; R5.1@6892.92,2344.23 6892.92,2389.92 ; R5.1@6906.39,2346.26 6892.92,2389.92 ; v3@7012.48,2201.21 6929.22,2223 ; v3@7014.91,2231 6929.22,2223 ; v3(7015,2216) 6929.22,2223 ; v3(7023,2396) 7029.08,2389.92 6892.92,2389.92
  Top Layer w50: J17.6@89,2089 151,2089 559,1681 4212,1681 4466,1935 v3@4466,2453 ; v3(3753,5481) 3654,5382 3654,5105 3593,5044 ; 4287.12,2463 v3(4464,2453) 4466,2277.93 ; v3@4464,2463 2545,2463 2167.07,2840.93 J14.7@2167.07,3725.69 J14.8@2167.07,3804.43 J14.10@2245.81,3804.43 ; v3(4810,2708) 4866.2,2764.2 K1.1@4916.39,2764.2 ; C3.2@5717.87,2564.27 C3.2@5723.77,2570.18 ; D4.2@6177.88,1324.93 C21.2@6414.3,1324.93 ; D4.2@6188.07,1321.34 C21.2@6387.35,1324.93 ; D4.2@6234.75,1322.18 6408.39,1324.93 D4.2@6234.77,1324.93 ; 6331.3,1497.3 6343.93,1509.93 ; C22.2@6408.39,1509.93 6343.93,1509.93 ; C22.2@6414.3,1509.93 6343.93,1509.93 ; J14.10@2245.81,3804.43 J14.9@2245.81,3725.69 J14.10@2245.81,3804.43 ; 3593,5044 v3(3455,5048) 3459,5044 3593,5044 ; C3.2@5723.77,2570.18 5812.36,2570.18 5716.2,2564.93 C2.2@5816.29,2570.18 ; C3.2@5723.77,2570.18 C2.2@5816.29,2570.18 ; v3(5816,2281) 5821.3,2361.3 v3@5821.3,2286.3 ; v3(5816,2281) U1.1@5821.3,2396.3 ; v3(5816,2281) v3@5821.3,2286.3 ; C2.2@5816.29,2570.18 5821.3,2431.3 C2.2@5821.3,2565.18 ; C2.2@5816.29,2570.18 U1.1@5821.3,2396.3 ; C2.2@5816.29,2570.18 C2.2@5821.3,2565.18 ; v3@5821.3,2286.3 U1.1@5821.3,2396.3 ; U1.1@5821.3,2396.3 C2.2@5821.3,2565.18 ; J18.6@4045.89,5626.93 J18.5@4045.89,5705.67 J18.6@4045.89,5626.93
  Top Layer w80: Q4.2@5654.56,1386.67 6070.25,1321.34 ; Q4.2@5674.64,1464.73 6070.25,1321.34 ; Q4.2@5677.3,1528.3 5863.3,1528.3 6070.25,1321.34 ; Q4.2@5703.87,1528.3 6070.25,1321.34 ; Q4.2@5743.22,1586.14 6070.25,1321.34 ; Q4.2@5799.71,1643.63 6070.25,1321.34 ; v4(6146,2277) 6206,2337 6365,2337 ; D4.2@6188.07,1321.34 6300,1447.05 ; 6381.61,1971.42 6381.61,1754.61 ; 6381.61,1987.17 6381.61,2278.35 ; 6419.08,2337 R4.1@6682.93,2340.3 ; R4.1@6679.63,2337 6365,2337 ; 6070.25,1321.34 D4.2@6160.52,1321.34 ; 6070.25,1321.34 D4.2@6174.3,1321.34 ; v4(6127,769) 6135.31,897.13 v4@6135.31,777.31 ; v4(6127,769) C20.1@6135.31,905 ; v4(6127,769) v4@6135.31,777.31 ; v4@6135.31,777.31 C20.1@6135.31,905 ; C20.1@6135.31,905 6135.31,1103.42 6135.31,912.87 C19.1@6135.31,1111.3 ; C20.1@6135.31,905 C19.1@6135.31,1111.3 ; C19.1@6135.31,1111.3 D4.2@6160.52,1321.34 ; C19.1@6135.31,1111.3 D4.2@6135.31,1282.36 ; D4.2@6135.31,1282.36 6135.31,1119.17 D4.2@6160.52,1321.34 ; D4.2@6135.31,1282.36 D4.2@6174.3,1321.34 ; D4.2@6174.3,1321.34 6177.88,1324.93 6300,1447.05 ; 6300,1447.05 6300,1673 6381.61,1754.61 ; 6365,2337 6381.61,2320.39 6381.61,1979.3 6381.61,1754.61
  Bottom Layer w20: v3@7000.24,2218.67 7023,2302.34 ; v3@7008.06,2394.68 7023,2311 v3@7037.94,2394.68 ; v3(7023,2396) 7023,2224 v3(7015,2216) 7023,2302.34 ; v3@7030,2215.91 7023,2302.34
  Bottom Layer w50: v3(3455,5048) 3457,4872.92 ; v3@3457,5044 3457,4718.19 3656,4519.19 3656,2800 3972,2484 4934,2484 ; v3(3753,5481) 3825,5553 4011,5553 ; 4275.39,2484 v3(4464,2453) 4652.56,2484 ; v3(4810,2708) 4810,2608 4934,2484 ; 5684.93,2412.07 v3(5816,2281) ; 5955.96,2275 v4(6146,2277) ; 5991.79,2275 v3(5816,2281) ; v4@6145,2275 5822,2275 v3(5816,2281) ; 4011,5553 J18.6@4045.89,5626.93 ; 4011,5553 4045.89,5587.89 ; 4045.89,5587.89 J18.6@4045.89,5626.93 ; 4045.89,5587.89 J18.6@4045.89,5626.93 ; 4045.89,5587.89 J18.6@4045.89,5626.93 ; 4934,2484 5613,2484 v3(5816,2281)
  Bottom Layer w80: v4(6127,769) 6672,769 6703.46,800.46 6703.46,1137.74 6637.21,1204 J6.4@6622,1204
+2.5V_S: C67.1 C69.1 C77.1 C78.1 C82.2 C83.2 C84.2 C90.1 C91.1 C94.1 J10.1 J11.1 U4.6 U5.21 | length 14878.6
  Top Layer w10: C94.1@1723.93,5520.83 1738.3,5488.7 ; C94.1@1738.3,5523.89 1738.3,5488.7 ; C94.1@1738.3,5525.86 1738.3,5488.7 ; C94.1@1752.66,5520.83 1738.3,5488.7 ; U5.21@1964.82,5151.44 1964.82,5268.73 1928.34,5305.2 1928.34,5418.66 1875,5472 1755,5472 1738.3,5488.7 ; U5.21@1964.82,5190.69 1964.82,5226.44
  Top Layer w30: J11.1@-111.93,4698.11 85.14,4698.11 C67.1@97.33,4685.93 ; J11.1@-76.5,4698.11 27.28,4698.11 ; -25.11,4698.11 C67.1@91.42,4685.93 ; C67.1@100.65,4685.93 v1(205.65,4685.93) ; 1496,5565.85 v1(1499,5671) 1572.97,5755.97 ; C90.1@1542.67,5525.86 C91.1@1652.36,5525.86 ; C90.1@1554.1,5524.63 1513.14,5525.86 ; C84.2@6304.32,4867.12 C82.2@6404.8,4877.71 ; C84.2@6305.29,4867.17 C82.2@6404.8,4883.61 ; C84.2@6305.29,4900.05 C82.2@6404.8,4883.61 ; C84.2@6306.24,4899.95 C82.2@6404.8,4877.71 ; 6420.62,4850.4 6434.41,4745.05 6434.41,4847.05 ; U4.6@6434.41,4712.05 6434.41,4854 ; U4.6@6434.41,4756.54 C82.2@6416.61,4877.71 ; C83.2@6518.61,4877.71 6599.97,4790.45 ; v5(6785,4746) 6644.41,4746 C83.2@6512.7,4877.71 ; C78.1@6867.41,4896.73 v1(6827,4962) ; C78.1@6873.32,4896.73 6873.32,4915.68 v1(6827,4962) ; C78.1@6882.79,4906.21 C78.1@6892.27,4896.73 ; C77.1@6984.23,4896.73 7097.86,4896.73 ; 7020.86,4896.73 J10.1@7127.09,4875.27 ; C67.1@97.33,4685.93 199.74,4685.93 C67.1@103.23,4685.93 ; C67.1@97.33,4685.93 v1(205.65,4685.93) ; C67.1@103.23,4685.93 v1(205.65,4685.93) ; C67.1@103.23,4685.93 v1(205.65,4685.93) ; 1513.14,5525.86 1496,5543 1496,5679 1819,6002 6005,6002 6536,5471 6536,5072 6611,4997 6792,4997 v1(6827,4962) ; 1513.14,5525.86 C91.1@1652.36,5525.86 ; C91.1@1652.36,5525.86 1565.91,5524.63 C91.1@1652.36,5525.86 ; C91.1@1652.36,5525.86 C94.1@1738.3,5525.86 ; C91.1@1652.36,5525.86 C94.1@1738.3,5525.86 ; C91.1@1652.36,5525.86 C94.1@1738.3,5525.86 ; C91.1@1652.36,5525.86 C94.1@1738.3,5525.86 ; C82.2@6404.8,4877.71 6303.94,4883.61 C82.2@6404.8,4883.61 ; C82.2@6404.8,4877.71 C84.2@6300,4883.61 C82.2@6404.8,4883.61 ; C82.2@6404.8,4883.61 C82.2@6410.7,4877.71 ; C82.2@6410.7,4877.71 6506.8,4877.71 C82.2@6416.61,4877.71 ; C82.2@6410.7,4877.71 C83.2@6512.7,4877.71 ; C82.2@6410.7,4877.71 6434.41,4854 ; C82.2@6416.61,4877.71 C83.2@6512.7,4877.71 ; C82.2@6416.61,4877.71 6434.41,4854 ; C82.2@6416.61,4877.71 6434.41,4854 ; C78.1@6892.27,4896.73 6972.42,4896.73 6879.22,4896.73 C77.1@6978.33,4896.73 ; C78.1@6892.27,4896.73 C77.1@6978.33,4896.73 ; C77.1@6978.33,4896.73 7141.07,4896.73 ; 7141.07,4896.73 J10.1@7162.52,4875.27 7141.07,4896.73
  Bottom Layer w20: v1(205.65,4685.93) 205.65,4791.35 124.33,4872.67 124.33,5110.99 155,5141.65 155,5397 185,5427 439.3,5427 683.3,5671 v1(1499,5671) ; v5@6775.93,4757.95 6824,4785 ; v5(6785,4746) 6824,4785 ; v5@6796.95,4736.93 6824,4785 ; 6824,4886.69 v1(6827,4962) 6824,4959 6824,4785
+3.3V_A: C99.2 C101.2 C103.2 L4.2 U5.22 | length 1301.3
  Top Layer w10: C103.2@1821.3,5400.79 1899.21,5400.79 1910.34,5389.66 1910.34,5297.75 1945.13,5262.96 U5.22@1945.13,5151.44 ; C103.2@1823.47,5386.27 1870.98,5400.79 C103.2@1823.47,5415.31 ; U5.22@1945.13,5190.69 1945.13,5226.44
  Top Layer w30: L4.2@1560.29,5386.04 1582.92,5408.67 ; C103.2@1821.3,5400.79 C101.2@1738.3,5400.79 C101.2@1730.42,5408.67 ; L4.2@1560.29,5388.01 1646.45,5408.67 1582.92,5408.67 ; L4.2@1560.29,5388.01 1582.92,5408.67 ; L4.2@1560.29,5388.01 C99.2@1652.36,5408.67 ; L4.2@1560.29,5388.01 1582.92,5408.67 ; 1582.92,5408.67 C99.2@1652.36,5408.67 ; C99.2@1652.36,5408.67 1738.3,5402.76 1658.26,5408.67 C101.2@1730.42,5408.67 ; C99.2@1652.36,5408.67 C101.2@1730.42,5408.67